# Altium PCB LOADCELL_PCB.PcbDoc
Units mm, origin at the board's own origin, x right, y up, seen from the top; angles counter-clockwise.
Board outline 86 x 44 mm, 2 copper layers (Top Layer, Bottom Layer); 4 components, 5 nets, 16 pads, 4 vias.
Unrouted connection lines stored in the file: 1.
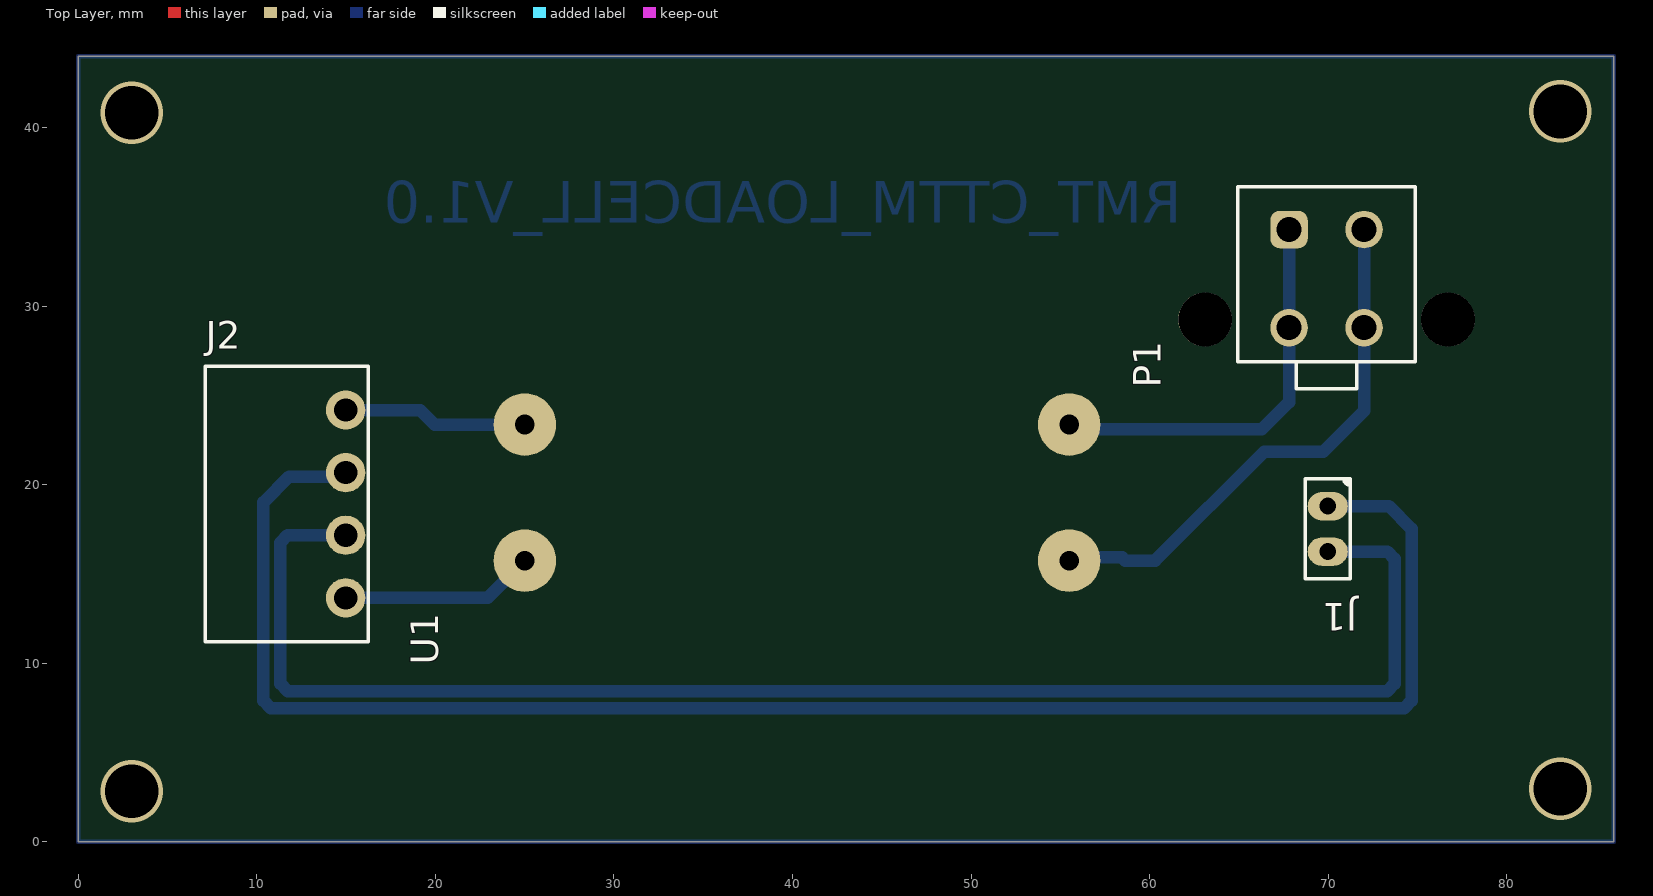
[diagram p0: Top Layer view]
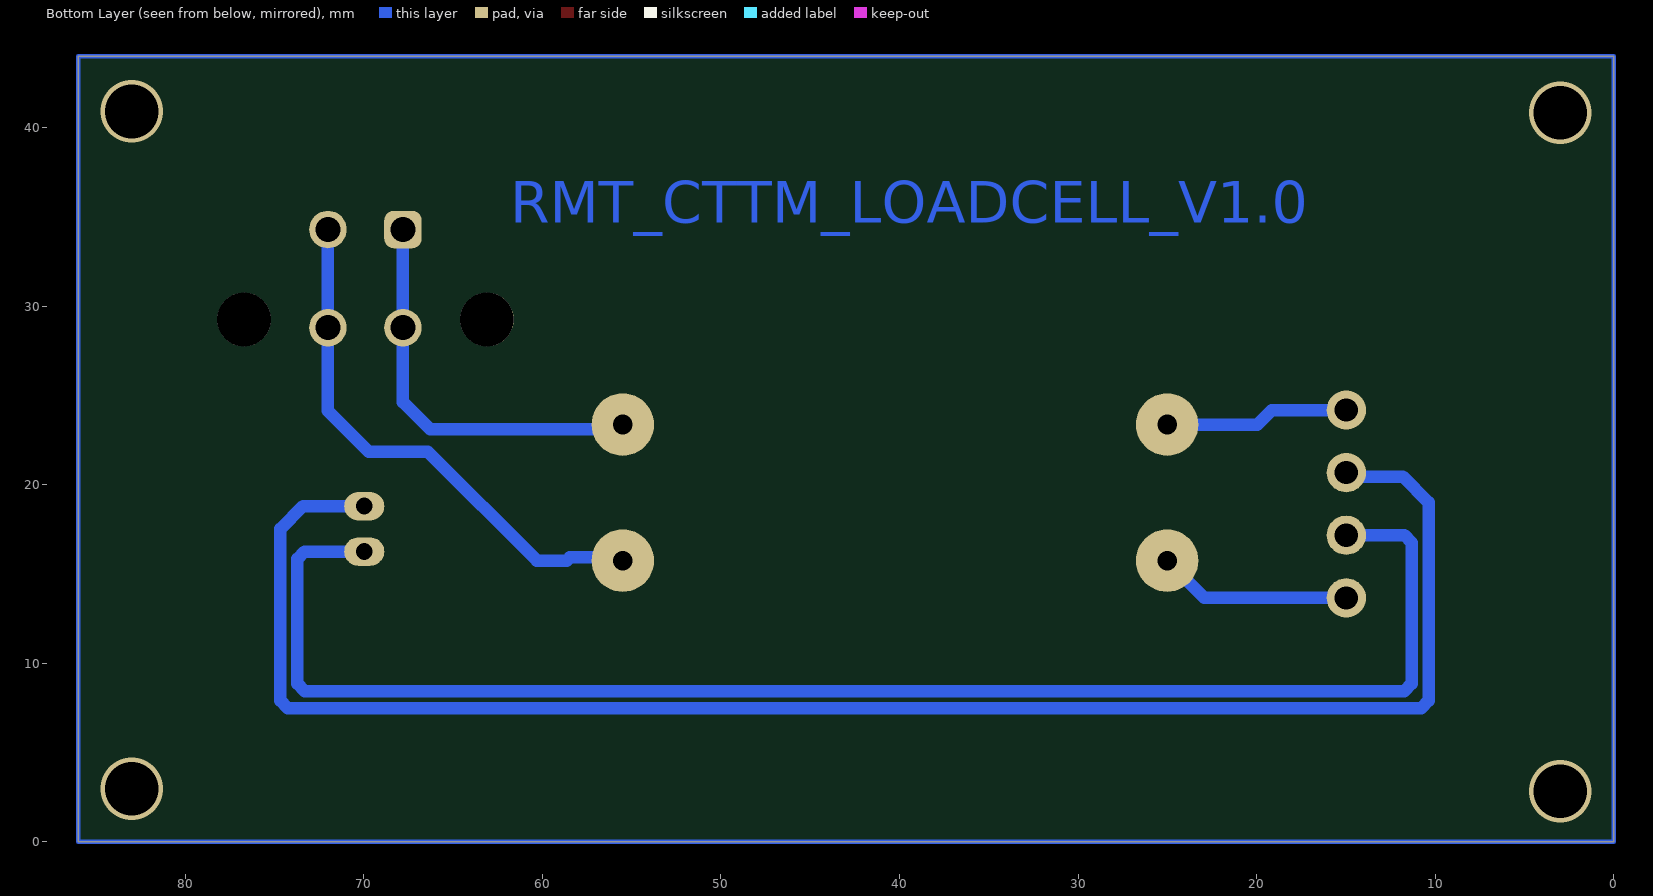
[diagram p1: Bottom Layer view, seen from below]
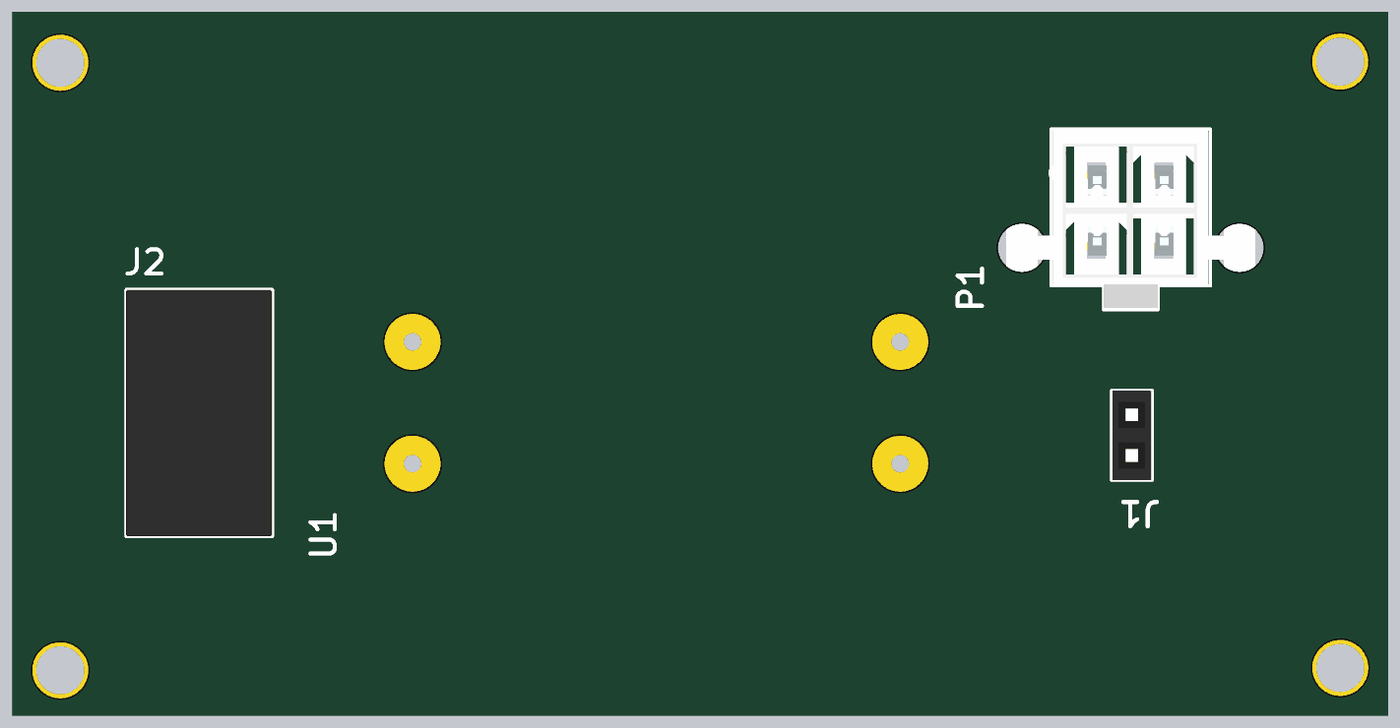
[diagram p2: 3D render of the assembled board from above, using the file's embedded part models]

## Layer stack, top to bottom
Top Solder: solder mask 0.0102, Solder Resist, Dk 3.5
Top Layer: signal copper 0.0356
Dielectric 1: dielectric 0.32, FR-4, Dk 4.8
Bottom Layer: signal copper 0.0356
Bottom Solder: solder mask 0.0102, Solder Resist, Dk 3.5

## Board outline
0,0 0,44 86,44 86,0

## Design rules (kind name [scope] priority, off if disabled: settings)
Clearance [All] p1: gap=0.254 ignorepadtopadclearanceinfootprint=FALSE except(0: Arc-Hole Track-Hole SMDPad-Hole THPad-Hole Via-Hole Fill-Hole Poly-Hole Region-Hole Text-Hole)
PolygonConnect [All] p1: connectstyle=Relief reliefconductorwidth=0.254 reliefentries=4 polygonreliefangle="90 Angle" airgapwidth=0.254
RoutingVias [All] p1: holewidth=0.711 width=1.27 viastyle="Through Hole" minholewidth=0.711 minwidth=1.27 maxholewidth=0.711 maxwidth=1.27
SolderMaskExpansion [All] p1: expansion=0.102 istentingtop=FALSE
Width [All] p1: maxlimit=0.7 minlimit=0.7 preferedwidth=0.7
30 further rules are at their usual default settings.

## Components (designator, comment, footprint, x,y, rotation, side; value= is the part's Value field where it differs from the comment)
J1 "LOAD_CELL" "SAMTEC SSW-102-03-T-S" 69.977,17.526 r270 top
J2 "0395021004" "MOLEX 395021004" 11.684,18.923 r90 top
P1 "649004221732" 649004221732 69.909,31.78 r180 top
U1 "MT6308" PCBComponent_1 55.499,23.368 r180 top

## Footprints (in the part's own frame and the unit in brackets; to place one, negate y for a bottom-side part, rotate by r counter-clockwise, add the part's x,y. Pads: shape width x height; smd on the part's side, far side on the other; paste and mask are expansions set on the pad)
649004221732 [mm] "4.20mm Male Dual Row Vertical Header with Mounting Pegs, 4p"
  rrect50% 2.1x2.1 hole 1.4: 1(2.1,-2.51)
  round 2.1 hole 1.4: 2(-2.1,-2.51) 3(2.1,2.99) 4(-2.1,2.99)
  round 3 hole 3 unplated: MH2(6.8,2.53) ""(-6.8,2.53)
  silkscreen extent -4.97,-4.9 4.98,6.4, body extent -7.8,-4.8 7.8,6.3, height 12.84
"MOLEX 395021004" [mil] "4 Position Terminal Block Header, Male Pins, 3.5mm Pitch,15.44mmx9.2mm Body, 90°, Right Angle, THT"
  round 86.61 hole 51: 1(-207,-130) 2(-69,-130) 3(69,-130) 4(207,-130)
  silkscreen extent -304,-180 304,180, body extent -304,-180 304,180, height 280
PCBComponent_1 [mm]
  round 3.5 hole 1.1: VIN+(0,0) VIN-(0,7.62) VOUT+(30.48,0) VOUT-(30.48,7.62)
"SAMTEC SSW-102-03-T-S" [mm]
  oval 1.6x2.25 hole 0.95: 1(-1.27,0) 2(1.27,0)
  silkscreen extent -2.8,-1.27 2.8,1.27, body extent -2.79,-1.21 2.79,1.21, height 8.51

## Part data
J1: library part SSW-102-03-T-S, "CONN RCPT 2POS 0.1 TIN PCB", Current Rating (Amps)="5.7A per Contact", Insulation Color=Black, Manufacturer="Samtec Inc.", Material Flammability Rating="UL94 V-0", Operating Temperature="-55°C ~ 105°C", Supplier Part Number 1=SSW-102-03-T-S-ND, ComponentLink2Description="DigiKey Link", ComponentLink2URL=http://digikey.com/product-detail/en/samtec-inc/SSW-102-03-T-S/SSW-102-03-T-S-ND/7873010, Connector Type=Receptacle, Contact Finish - Mating=Tin, Contact Finish - Post=Tin, Contact Type=Forked, Fastening Type=Push-Pull, LastUpdated="6/21/2022 3:06:02 PM", Lifecycle Status=Active, Minimum Order=1, Mounting Type="Through Hole", Number of Positions=2, Number of Positions Loaded=All, Number of Rows=1, Packaging=Bulk, Part Number=SSW-102-03-T-S, Part Status=Active, Price=0.53, Series=SSW, Style="Board to Board or Cable", Supplier 1=DigiKey, Termination=Solder
J2: "TERM BLOCK HDR 4POS 90DEG 3.5MM", Color=Black, Current - UL=8A, Manufacturer=Molex, Operating Temperature="-40°C ~ 105°C", Supplier Part Number 1=WM7772-ND, Voltage - UL=300V, ComponentLink1Description=Datasheet, ComponentLink1URL=https://www.molex.com/pdm_docs/sd/395021002_sd.pdf, ComponentLink2Description="DigiKey Link", ComponentLink2URL=http://digikey.com/product-detail/en/molex/0395021004/WM7772-ND/1280623, Contact Mating Finish=Tin, Header Orientation="90°, Right Angle", LastUpdated="6/25/2020 3:44:36 PM", Lifecycle Status=Active, Minimum Order=1, Mounting Type="Through Hole", Number of Levels=1, Number of Positions=4, Packaging=Tray, Part Number=0395021004, Part Status=Active, Pitch="0.138\" (3.50mm)", Positions Per Level=4, Price=1.07, Series="Eurostyle ESE 39502", Supplier 1=DigiKey, Termination Style=Solder, Type="Header, Male Pins, Shrouded (4 Side)"
P1: library part CMP-1502-00506-2, Color=White, Contact Resistance=10mΩ, Current Rating=8A, Insulation Resistance=1GΩ, Max Operating Temperature=105°C, Min Operating Temperature=-40°C, Operating Supply Voltage=600V, Connector Type="Male Pin, Plug", Contact Material=Copper, Contact Plating=Tin, Fastening Type=Ramp, Gender=Male, Height=12.8mm, Lead Pitch=4.2mm, Length=9.6mm, Mount="Through Hole", NexarPartId=23024601, Number of Contacts=4, Number of Pins=4, Number of Positions=4, Number of Rows=2, Orientation=Vertical, Pitch=4.2mm, REACH SVHC=Unknown, RoHS=Compliant, Row Spacing=4.191mm, Termination=Solder, Width=9.6mm
U1: library part U

## Via types
v1: diameter 3.5, hole 3, Top Layer to Bottom Layer, 4 vias

## Nets (pads, with @x,y where several pads share a name; then routed paths per layer and width w, separated by ;. In a path a pad name is that pad's centre, name@x,y a point inside that pad or via, vN(x,y) a via of type N, cw(c..) or ccw(c..) an arc to the next point about the centre after c; other vN are vias at no path point)
+12V: P1.1 P1.3 U1.VIN+ | length 22.5
  Bottom Layer w0.7: U1.VIN+ 55.753,23.114 66.294,23.114 67.809,24.629 P1.3 ; P1.1 67.809,29.414 P1.3@68.094,29.13
AGND: J1.2 J2.2 | length 85.4
  Bottom Layer w0.7: J2.2 11.735,17.17 11.325,16.76 11.325,8.857 11.735,8.447 73.312,8.447 73.722,8.857 73.722,15.846 73.312,16.256 J1.2
GND: J2.1 P1.2 P1.4 U1.VIN- U1.VOUT- | length 41.2
  Bottom Layer w0.7: J2.1 22.936,13.665 U1.VOUT- ; U1.VOUT-@25.14,15.742 U1.VOUT-@25.146,15.748 ; U1.VIN- 55.679,15.928 58.456,15.928 58.635,15.749 60.315,15.749 66.409,21.844 69.723,21.844 72.009,24.13 P1.4 P1.2
LOADCELL: J1.1 J2.3 | length 95.9
  Bottom Layer w0.7: J2.3 14.757,20.447 11.811,20.447 10.371,19.007 10.371,7.903 10.781,7.493 74.266,7.493 74.676,7.903 74.676,17.526 73.406,18.796 J1.1
VOUT+: J2.4 U1.VOUT+ | length 10.4
  Bottom Layer w0.7: J2.4 19.152,24.181 19.965,23.368 U1.VOUT+
pads on no net: P1. P1.MH2
copper on no net: | length 260
  Bottom Layer w0.254: 0,0 86,0 86,44 0,44 0,0
  other v1: 3.006,2.825 83.006,2.975 3.006,40.825 83,40.9

## Other copper
Bottom Layer:
  text "RMT_CTTM_LOADCELL_V1.0" at 61.797,33.893 h4